# Altium PCB test2.PcbDoc
Units mil, origin at the board's own origin, x right, y up, seen from the top; angles counter-clockwise.
Board outline 1054.5 x 2992.13 mil, 2 copper layers (Top Layer, Bottom Layer); 28 components, 24 nets, 145 pads, 0 vias.
Unrouted connection lines stored in the file: 72.
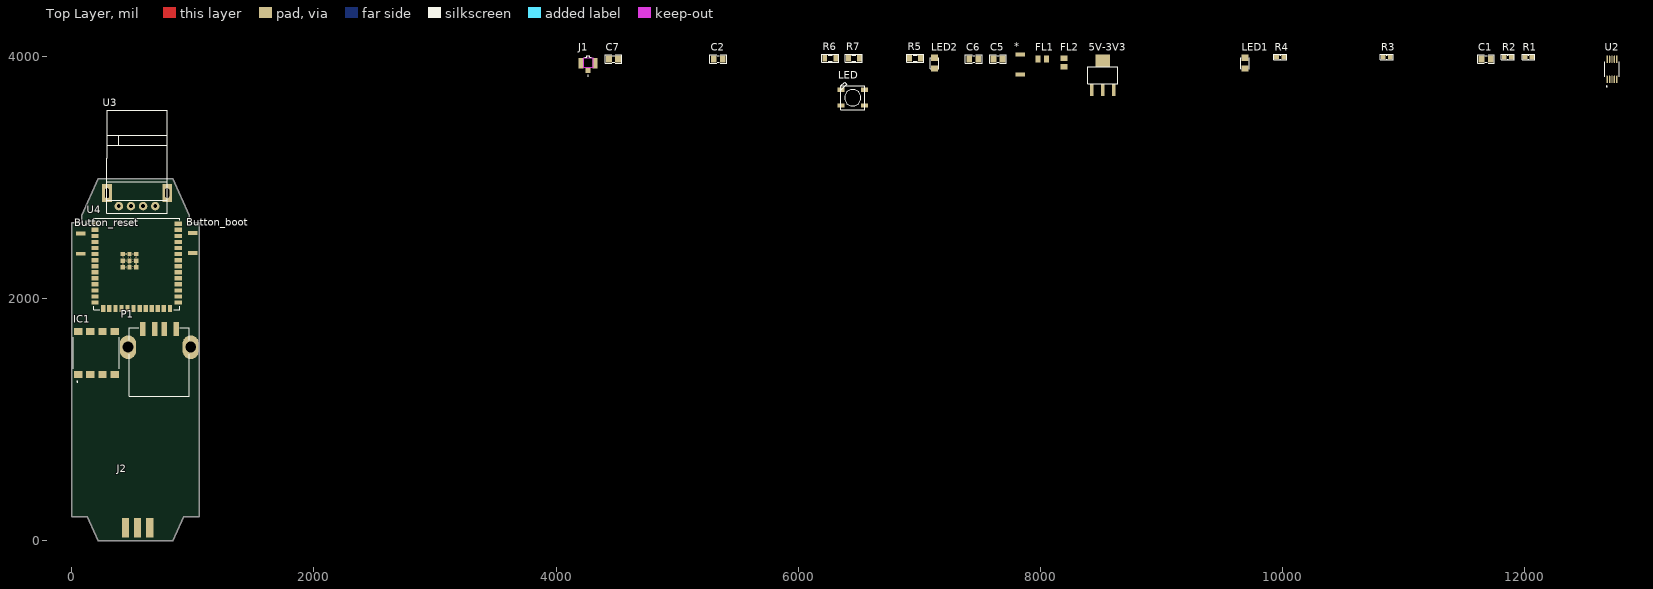
[diagram p0: Top Layer view]
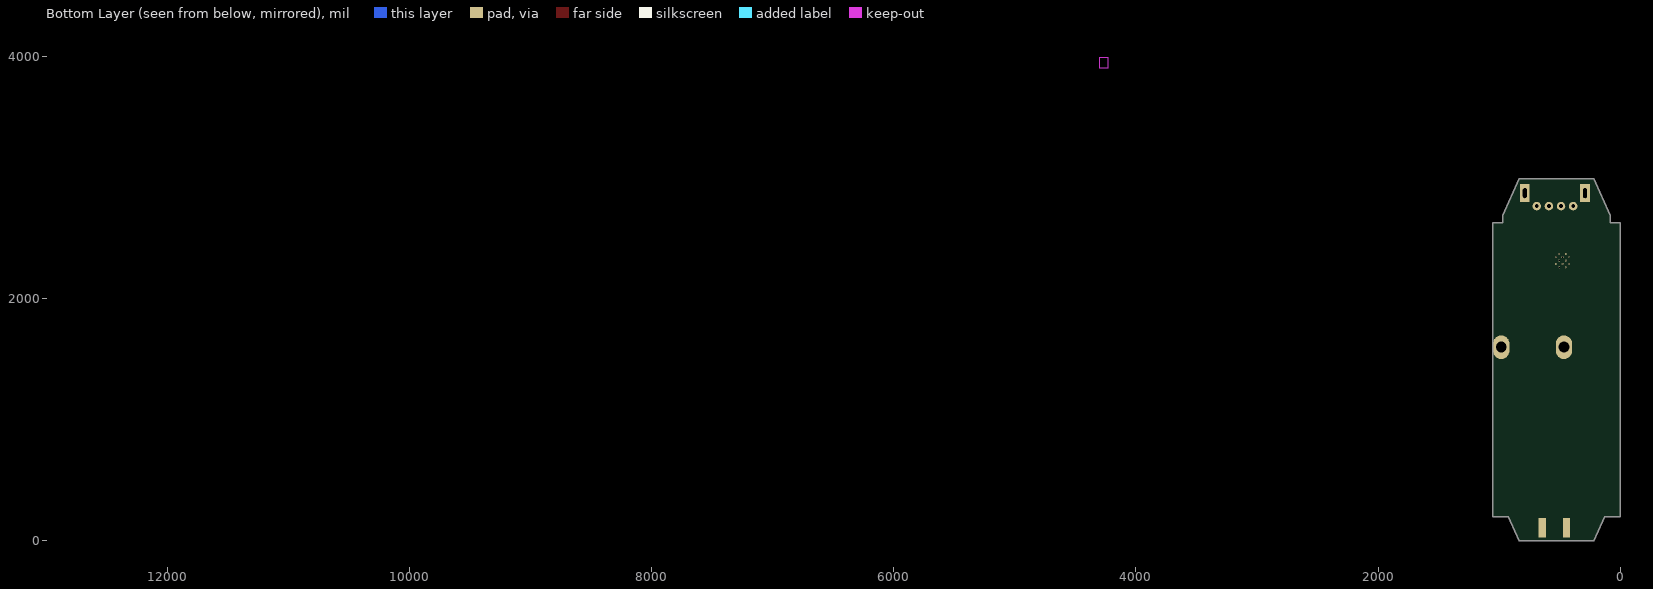
[diagram p1: Bottom Layer view, seen from below]

## Layer stack, top to bottom
Top Solder: solder mask 0.4, Solder Resist, Dk 3.5
Top Layer: signal copper 1.4
Dielectric 1: dielectric 12.6, FR-4, Dk 4.8
Bottom Layer: signal copper 1.4
Bottom Solder: solder mask 0.4, Solder Resist, Dk 3.5

## Board outline
0.25,200.49 0.25,2627.48 84.59,2627.48 84.59,2687.88 218.45,2992.38 836.56,2992.38 970.42,2687.88 970.42,2627.48 1054.75,2627.48 1054.75,200.49 924.58,200.49 836.56,0.25 218.45,0.25 130.42,200.49

## Design rules (kind name [scope] priority, off if disabled: settings)
Clearance [All] p1: gap=10 ignorepadtopadclearanceinfootprint=FALSE except(0: Arc-Hole Track-Hole SMDPad-Hole THPad-Hole Via-Hole Fill-Hole Poly-Hole Region-Hole Text-Hole)
PolygonConnect [All] p1: connectstyle=Relief reliefconductorwidth=10 reliefentries=4 polygonreliefangle="90 Angle" airgapwidth=10
RoutingVias [All] p1: holewidth=28 width=50 viastyle="Through Hole" minholewidth=28 minwidth=50 maxholewidth=28 maxwidth=50
SolderMaskExpansion [All] p1: expansion=4 istentingtop=FALSE
Width [All] p1: maxlimit=10 minlimit=10 preferedwidth=10
30 further rules are at their usual default settings.

## Components (designator, comment, footprint, x,y, rotation, side; value= is the part's Value field where it differs from the comment)
5V-3V3 "LM1117-3.3V" LM1117-SOP 8515,3775 r0 top
* "Component_1" PCBComponent_1 7835,3935 r90 top
Button_boot "Component_1" PCBComponent_1 1000,2460 r90 top
Button_reset "Component_1" PCBComponent_1 75,2455 r90 top
C1 "104" "tu 0805" 11680,3980 r0 top
C2 "104" "tu 0805" 5340,3980 r0 top
C5 "104" "tu 0805" 7650,3980 r0 top
C6 "104" "tu 0805" 7450,3980 r0 top
C7 "104" "tu 0805" 4475,3980 r0 top
FL1 "BLM21SP111SH1D" BEADC2012X105N 8015,3980 r0 top
FL2 "BLM21SP111SH1D" BEADC2012X105N 8195,3950 r90 top
IC1 "Component_1" COUPL_6N138SDM 205,1552.36 r90 top
J1 "20279-001E-03" IPEX_20279-001E-03 4265,3945 r0 top
J2 "SMA" "LINX CONREVSMA003.062" 545,200.79 r90 top
LED "WS2812B" WS2812B 6450,3660 r0 top
LED1 "LED" SM-LED-0805-Blue 9690,3900 r90 top
LED2 "LED" SM-LED-0805-Blue 7125,3900 r90 top
P1 "USB" USB-A-FEMALE-SMD 725,1600 r0 top
R1 "270" "tro smd 0603" 12030,3995 r0 top
R2 "10K" "tro smd 0603" 11860,3995 r0 top
R3 "270" "tro smd 0603" 10860,3995 r0 top
R4 "10K" "tro smd 0603" 9980,3995 r0 top
R5 "4K7" RES-SMD-0805 6965,3985 r0 top
R6 "4K7" RES-SMD-0805 6265,3985 r0 top
R7 "4K7" RES-SMD-0805 6460,3985 r0 top
U2 "FSUSB42MUX" SOP50P490X110-10N 12720,3895 r90 top
U3 "USB-A Through-Hole" USB-A 390,2765 r0 top
U4 "ESP32-S3-WROOM-1U" XCVR_ESP32-S3-WROOM-1U 536.61,2287.72 r0 top

## Footprints (in the part's own frame and the unit in brackets; to place one, negate y for a bottom-side part, rotate by r counter-clockwise, add the part's x,y. Pads: shape width x height; smd on the part's side, far side on the other; paste and mask are expansions set on the pad)
BEADC2012X105N [mm]
  rect 1.14x1.47 smd: 1(-0.89,0) 2(0.89,0)
COUPL_6N138SDM [mm]
  rect 1.52x1.78 smd: 1(-4.505,3.81) 2(-4.505,1.27) 3(-4.505,-1.27) 4(-4.505,-3.81) 5(4.505,-3.81) 6(4.505,-1.27) 7(4.505,1.27) 8(4.505,3.81)
  silkscreen extent -6.1,-4.83 3.3,4.83, body extent -5.15,-4.83 5.15,4.83, height 5.08
IPEX_20279-001E-03 [mm]
  rect 1x1.05 smd: 1(0,-1.525)
  rect 1.05x2.2 smd: 2(1.475,0) 3(-1.475,0)
  Keep-Out Layer region: 0.95,-1 -0.95,-1 -0.95,1.1 0.95,1.1
  silkscreen extent -0.7,-2.71 0.7,1.55, body extent -1.5,-1.55 1.5,1.55, height 1.25
"LINX CONREVSMA003.062" [mm] "RP-SMA FEMALE EDGE MOUNT FOR 0.062\" THICK BOARD"
  rect 4.06x1.52 smd: G(-2.3,-2.54) G(-2.3,2.54) S(-2.3,0)
  rect 4.06x1.52 smd far side: G(-2.3,-2.54) G(-2.3,2.54)
  body extent -3.9,-3.97 7.86,3.96, height 4.61
LM1117-SOP [mm]
  rect 0.7x2.54 smd: 1(-2.3,-1.27) 2(0,-1.27) 3(2.3,-1.27)
  rect 3x2.54 smd: 2(0,4.826)
  silkscreen extent -3.17,0 3.17,3.56, body extent -3.25,-1.78 3.25,5.18, height 1.68
PCBComponent_1 [mm]
  rect 0.8x2 smd: 1(-2.1,0) 2(2.1,0)
  body extent -2.4,-1.45 2.4,1.45, height 2
RES-SMD-0805 [mil]
  rect 39.37x55 smd: 1(-45,0) 2(45,0)
  silkscreen extent -70,-34 70,33, body extent -39,-25 39,25, height 31
SM-LED-0805-Blue [mil]
  rect 50x55 smd: 1(0,0) 2(90,0)
  silkscreen extent 0,-35 90,35, body extent 5,-25 85,25, height 43
SOP50P490X110-10N [mm]
  rrect50% 1.5x0.28 smd: 1(-2.105,1) 2(-2.105,0.5) 3(-2.105,0) 4(-2.105,-0.5) 5(-2.105,-1) 6(2.105,-1) 7(2.105,-0.5) 8(2.105,0) 9(2.105,0.5) 10(2.105,1)
  silkscreen extent -3.7,-1.55 1.55,1.55, body extent -2.45,-1.5 2.45,1.5, height 1.1
"tro smd 0603" [mm] "Chip Capacitor, 2-Leads, Body 1,60x0,80mm, IPC Medium Density"
  rect 1x0.95 smd mask+0.076: 1(-0.75,0) 2(0.75,0)
  silkscreen extent -1.35,-0.58 1.37,0.58, body extent -0.82,-0.42 0.82,0.43, height 0.44
"tu 0805" [mm] "Compoment SMD 80x50mil"
  rect 1.2x1.4 smd: 1(-0.946,-0.003) 2(0.954,-0.003)
  silkscreen extent -1.75,-0.89 1.75,0.89, body extent -1.01,-0.64 1.01,0.63, height 0.61
USB-A [mil]
  round 70 hole 31: 1(0,0) 2(100,0) 3(200,0) 4(301,0)
  rect 80x150 hole 31 slot 80 at 90 deg: 5(-98,107) 6(399,107)
  silkscreen extent -101,-57 401,790, body extent -97,0 399,784, height 177
USB-A-FEMALE-SMD [mm]
  rect 1.12x3 smd: 1(-3.5,3.8) 2(-1,3.8) 3(1,3.8) 4(3.5,3.8)
  oval 3.4x5 hole 2.3: G1(-6.575,0) G2(6.575,0)
  silkscreen extent -6.3,-10.3 6.3,4.1, body extent -7.8,-10.35 7.8,4.96, height 7.7
WS2812B [mm]
  rect 1.5x0.9 smd: 1-VDD(2.45,-1.65) 2-DOUT(2.45,1.65) 3-GND(-2.45,1.65) 4-DIN(-2.45,-1.65)
  silkscreen extent -2.5,-2.5 2.5,3.2
XCVR_ESP32-S3-WROOM-1U [mm]
  rect 1.5x0.9 smd: 1(-8.75,8.41) 2(-8.75,7.14) 3(-8.75,5.87) 4(-8.75,4.6) 5(-8.75,3.33) 6(-8.75,2.06) 7(-8.75,0.79) 8(-8.75,-0.48) 9(-8.75,-1.75) 10(-8.75,-3.02) 11(-8.75,-4.29) 12(-8.75,-5.56) 13(-8.75,-6.83) 14(-8.75,-8.1) 27(8.75,-8.1) 28(8.75,-6.83) 29(8.75,-5.56) 30(8.75,-4.29) 31(8.75,-3.02) 32(8.75,-1.75) 33(8.75,-0.48) 34(8.75,0.79) 35(8.75,2.06) 36(8.75,3.33) 37(8.75,4.6) 38(8.75,5.87) 39(8.75,7.14) 40(8.75,8.41)
  rect 0.9x1.5 smd: 15(-6.985,-9.35) 16(-5.715,-9.35) 17(-4.445,-9.35) 18(-3.175,-9.35) 19(-1.905,-9.35) 20(-0.635,-9.35) 21(0.635,-9.35) 22(1.905,-9.35) 23(3.175,-9.35) 24(4.445,-9.35) 25(5.715,-9.35) 26(6.985,-9.35)
  rect 0.9x0.9 smd: 41_1(-2.9,2.09) 41_2(-1.5,2.09) 41_3(-0.1,2.09) 41_4(-2.9,0.69) 41_5(-1.5,0.69) 41_6(-0.1,0.69) 41_7(-2.9,-0.71) 41_8(-1.5,-0.71) 41_9(-0.1,-0.71)
  round 0.4 hole 0.2 mask+0: 41_10(-2.2,2.09) 41_11(-0.8,2.09) 41_12(-2.9,1.39) 41_13(-1.5,1.39) 41_14(-0.1,1.39) 41_15(-2.2,0.69) 41_16(-0.8,0.69) 41_17(-2.9,-0.01) 41_18(-1.5,-0.01) 41_19(-0.1,-0.01) 41_20(-2.2,-0.71) 41_21(-0.8,-0.71)
  silkscreen extent -10.6,-9.6 9,9.6, body extent -9,-9.6 9,9.6, height 3.35

## Part data
5V-3V3: library part LM1117, "800mA Low-Dropout Linear Regulator", Creator="Nguyen Ba Bien", Website=http://group3i.net
C1 C2 C5 C6 C7: library part "Tu 0805 104 50V 10%", "Dán", Chung_Loai=Dán, Don_Vi=Con, Ma_Hang=MH004551, So_Chan=2, Ten_Linh_Kien="Tụ 0805 104-100nF 10% 50V"
FL1 FL2: Package=None, Availability=Unavailable, MP=BLM21SP111SH1D, Price=None
J1: "1 POS Vertical SMD Small form factor with big performance through 6 GHz connector,MHF, RF, micro-coaxial MHF I Receptacle", Package=None, Check_prices=https://www.snapeda.com/parts/20279-001E-03/I-PEX/view-part/?ref=eda, MF=I-PEX, MP=20279-001E-03, SnapEDA_Link=https://www.snapeda.com/parts/20279-001E-03/I-PEX/view-part/?ref=snap
J2: library part "RF Connector - SMA"
LED: "Raspberry Pi HAT _40 pin_ Wheeled Robotics Kit", Package=None, Availability=Unavailable, MF="SparkFun Electronics", MP=WS2812B, Price=None, SnapEDA_Link=https://www.snapeda.com/parts/WS2812B/Worldsemi/view-part/1038297/?ref=snap
R1 R2 R3 R4: library part "Tro 0603 5% 1k", "Dán", Chung_Loai=Dán, Don_Vi=Con, Ma_Hang=MH006319, So_Chan=2, Ten_Linh_Kien="Trở 0603 5% 1k"
R5 R6 R7: library part R, "Resistor R1/4W"
U2: "FSUSB42 Series DPDT 4.3 V 480 Mbps SMT Hi Speed USB 2.0 Switch - MSOP-10", Package="MSOP-10 ON Semiconductor", Check_prices=https://www.snapeda.com/parts/FSUSB42MUX/Onsemi/view-part/?ref=eda, MF="ON Semiconductor", MP=FSUSB42MUX, SnapEDA_Link=https://www.snapeda.com/parts/FSUSB42MUX/Onsemi/view-part/?ref=snap
U3: library part "USB-A TH"
U4: "2.4 GHz Wi-Fi (802.11 b/g/n) and Bluetooth 5 (LE) module", Package=Package, Availability="Not in stock", Check_prices=https://www.snapeda.com/parts/ESP32-S3-WROOM-1U/Espressif+Systems/view-part/?ref=eda, MF="Espressif Systems", MP=ESP32-S3-WROOM-1U, Price=None, SnapEDA_Link=https://www.snapeda.com/parts/ESP32-S3-WROOM-1U/Espressif+Systems/view-part/?ref=snap

## Nets (pads, with @x,y where several pads share a name; then routed paths per layer and width w, separated by ;. In a path a pad name is that pad's centre, name@x,y a point inside that pad or via, vN(x,y) a via of type N, cw(c..) or ccw(c..) an arc to the next point about the centre after c; other vN are vias at no path point)
3V3: C1.1 C6.1 FL2.2 IC1.7 IC1.8 R2.2 R6.2 R7.2 U4.2
5V: C5.1 FL1.1 LED.1-VDD P1.1 R5.2 U2.1 U3.1
24V: R1.1 R3.2
D+: U2.7 U3.3
D-: U2.6 U3.2
EN: Button_reset.2 C7.1 R6.1 U4.3
ESP_D+: U2.9 U4.14
ESP_D-: U2.8 U4.13
GND: 5V-3V3.1 Button_boot.1 Button_reset.1 C1.2 C2.2 C5.2 C6.2 C7.2 IC1.3 IC1.5 LED1.2 LED2.2 LED.3-GND P1.4 R4.1 U2.5 U2.10 U3.4 U3.5 U3.6 U4.1 U4.40 U4.41_1 U4.41_2 U4.41_3 U4.41_4 U4.41_5 U4.41_6 U4.41_7 U4.41_8 U4.41_9
IO0: *.2 Button_boot.2 C2.1 R7.1 U4.27
IOHIGHSPEED: IC1.6 R2.1 U4.28
LED_LOAD: LED.4-DIN
Net5V-3V3_2: 5V-3V3.2 FL2.1
Net5V-3V3_3: 5V-3V3.3 FL1.2
NetIC1_2: IC1.2 R1.2 R4.2
NetJ1_1: J1.1 J2.S
NetJ1_2: J1.2 J1.3 J2.G
NetLED1_1: LED1.1 R3.1
NetLED2_1: LED2.1 R5.1
SEL_USB: U2.2 U4.23
U0RX: U4.37
U0TX: *.1 U4.36
USB_D+: P1.3 U2.3
USB_D-: P1.2 U2.4
pads on no net: IC1.1 IC1.4 LED.2-DOUT P1.G1 P1.G2 U4.4 U4.5 U4.6 U4.7 U4.8 U4.9 U4.10 U4.11 U4.12 U4.15 U4.16 U4.17 U4.18 U4.19 U4.20 U4.21 U4.22 U4.24 U4.25 U4.26 U4.29 U4.30 U4.31 U4.32 U4.33 U4.34 U4.35 U4.38 U4.39 U4.41_10 U4.41_11 U4.41_12 U4.41_13 U4.41_14 U4.41_15 U4.41_16 U4.41_17 U4.41_18 U4.41_19 U4.41_20 U4.41_21

## Silkscreen, mask and mechanical layers (free items; w line width, h text height)
Mechanical 1:
  lines w0.5: 0.25,200.49 0.25,2627.48 84.59,2627.48 84.59,2687.88 218.45,2992.38 836.56,2992.38 970.42,2687.88 970.42,2627.48 1054.75,2627.48 1054.75,200.49 924.58,200.49 836.56,0.25 218.45,0.25 130.42,200.49 0.25,200.49 ; 2545.75,3296.41 2545.75,5723.4 2684.5,5723.4 2684.5,5783.8 2818.36,6088.3 3436.47,6088.3 3570.33,5783.8 3570.33,5723.4 3709.08,5723.4 3709.08,3296.41 3524.5,3296.41 3436.47,3096.17 2818.36,3096.17 2730.33,3296.41 2545.75,3296.41